# Altium PCB ui_main.PcbDoc (part 1 of 3)
Units mil, origin at the board's own origin, x right, y up, seen from the top; angles counter-clockwise.
Board outline 7342.57 x 2614.56 mil, 2 copper layers (Top Layer, Bottom Layer); 207 components, 158 nets, 707 pads, 687 vias.
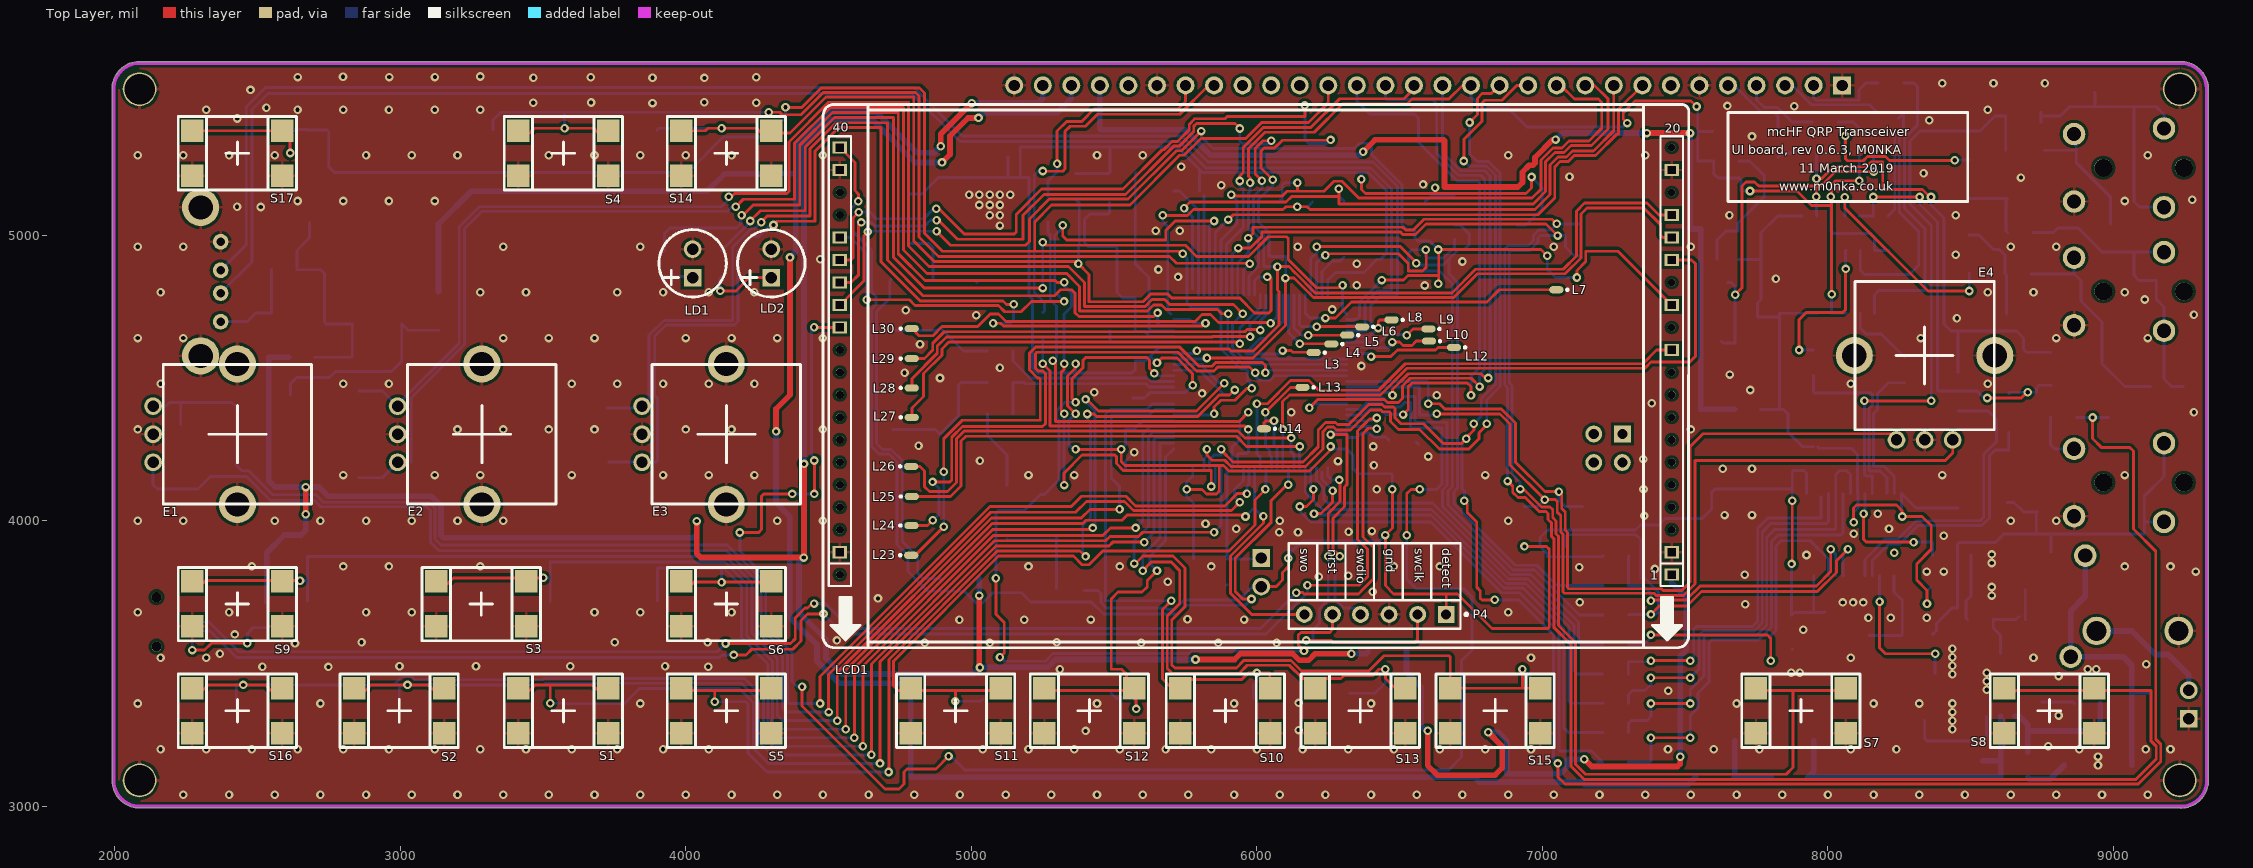
[diagram p0: Top Layer view]
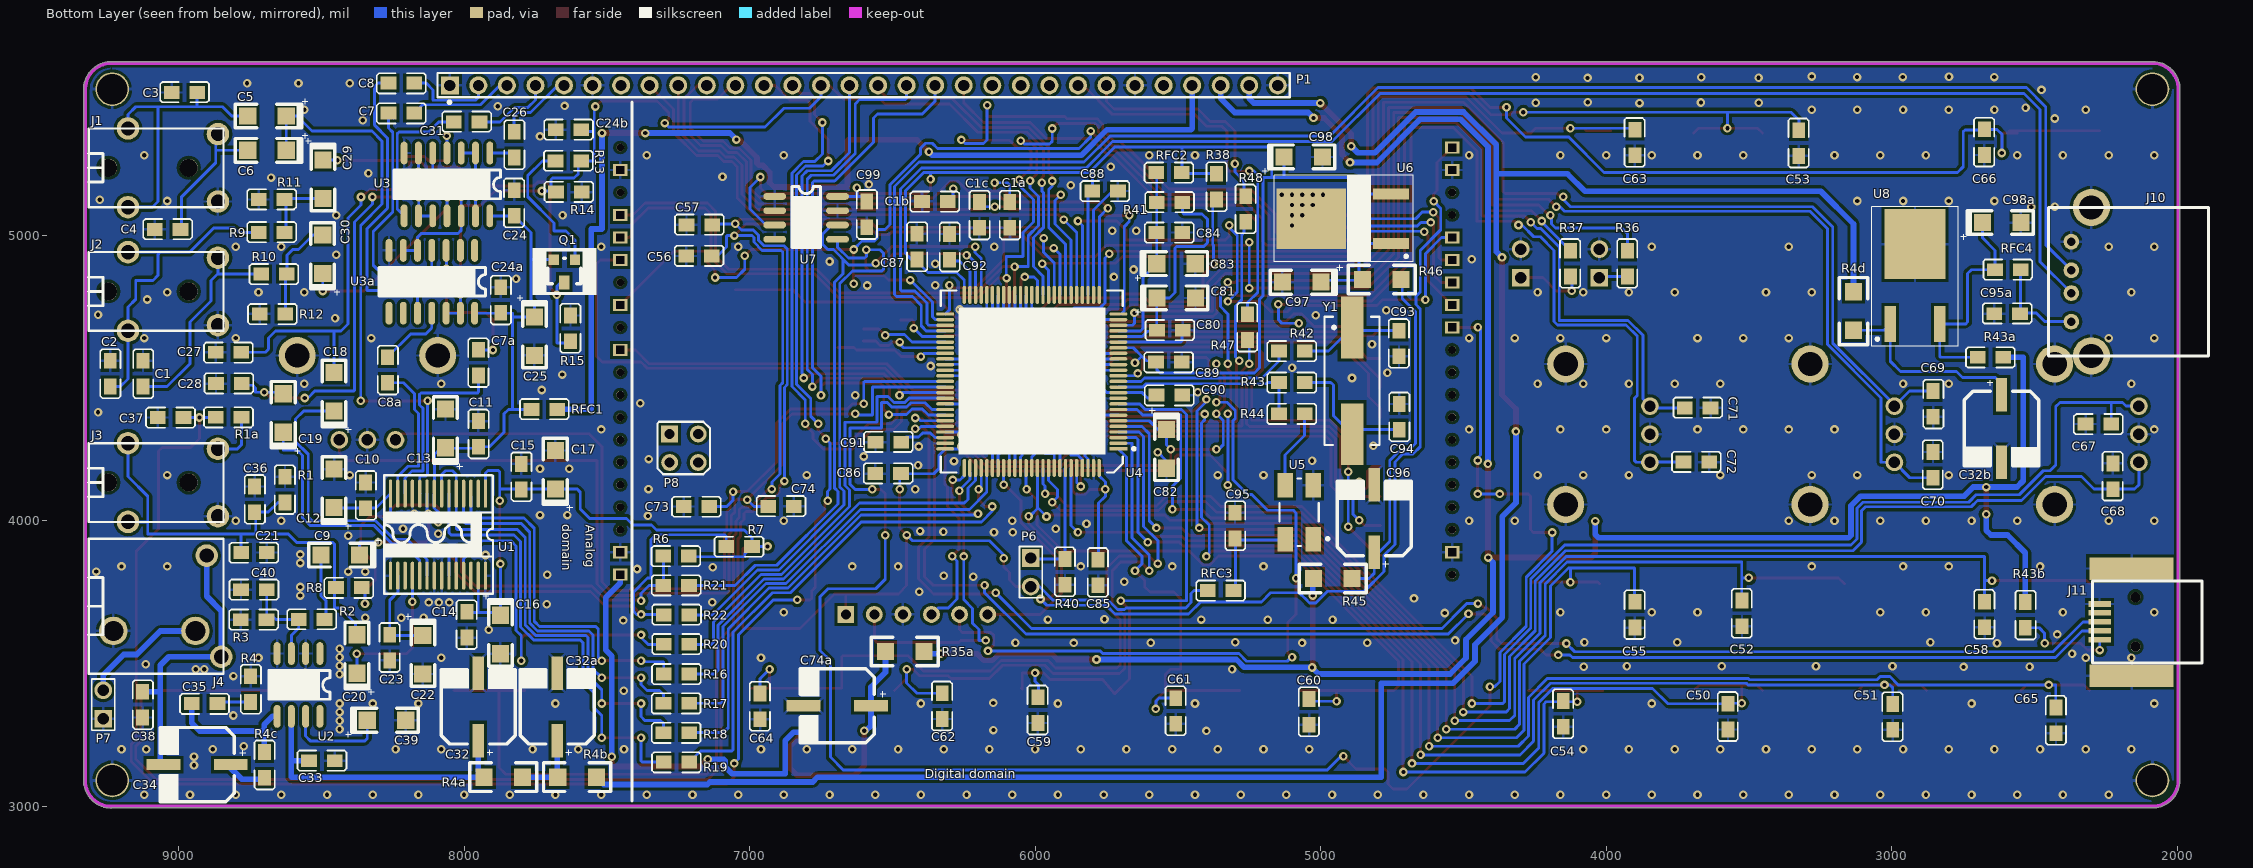
[diagram p1: Bottom Layer view, seen from below]

## Layer stack, top to bottom
Top Solder: solder mask 0.4, Solder Resist, Dk 3.5
Top Layer: signal copper 1.4
Dielectric1: core 12.6, FR-4, Dk 4.8
Bottom Layer: signal copper 1.4
Bottom Solder: solder mask 0.4, Solder Resist, Dk 3.5

## Board outline
2080.26,2994.34 cw(c2086.71,3090.71) 1990.14,3088.89 cw(c1996.06,3089) 1990.14,3089 1990.14,5509.94 cw(c2086.71,5511.71) 2084.89,5608.28 cw(c2085,5602.36) 2085,5608.28 9233.94,5608.28 cw(c9235.71,5511.71) 9332.12,5517.53 cw(c9326.77,5515) 9332.69,5515 9332.69,3092.06 ccw(c9236.12,3090.29) 9332.69,3092.11 9332.69,3092.06 cw(c9236.12,3090.29) 9332.71,3090.29 cw(c9236.12,3090.29) 9237.95,2993.72 cw(c9237.83,2999.64) 9235.8,2994.08 2082,2994.08 cw(c2082,3000)

## Design rules (kind name [scope] priority, off if disabled: settings)
Clearance Clearance_2 [InComponent('U4')] p1: gap=5 ignorepadtopadclearanceinfootprint=FALSE except(0: Arc-Hole Track-Hole SMDPad-Hole THPad-Hole Via-Hole Fill-Hole Poly-Hole Region-Hole Text-Hole)
Clearance Clearance_1 [InPolygon] p2: gap=10 ignorepadtopadclearanceinfootprint=FALSE except(0: Arc-Hole Track-Hole SMDPad-Hole THPad-Hole Via-Hole Fill-Hole Poly-Hole Region-Hole Text-Hole)
Clearance [All] p3: gap=6 ignorepadtopadclearanceinfootprint=FALSE except(0: Arc-Hole Track-Hole SMDPad-Hole THPad-Hole Via-Hole Fill-Hole Poly-Hole Region-Hole Text-Hole)
DiffPairsRouting [All] p1: maxlimit=50 minlimit=10 mostfreqgap=10 toplayer_minwidth=10 toplayer_maxwidth=10 toplayer_prefwidth=10 bottomlayer_minwidth=10 bottomlayer_maxwidth=10 bottomlayer_prefwidth=10 maxuncoupledlength=150
HoleSize [All] p1: absolutevalues=TRUE maxlimit=150 minlimit=1 maxpercent=80.000 minpercent=20.000
MatchedLengths "Schematic Matched Net Lengths_3" [InNet('USB_HOST_P')] p1: tolerance=150 checknetsindiffpair=TRUE checkdiffpairvsdiffpair=FALSE checkxsignals=FALSE checkothers=FALSE
MatchedLengths "Schematic Matched Net Lengths_2" [InNet('USB_HOST_N')] p2: tolerance=150 checknetsindiffpair=TRUE checkdiffpairvsdiffpair=FALSE checkxsignals=FALSE checkothers=FALSE
MatchedLengths "Schematic Matched Net Lengths_1" [InNet('USB_DFU_P')] p3: tolerance=150 checknetsindiffpair=TRUE checkdiffpairvsdiffpair=FALSE checkxsignals=FALSE checkothers=FALSE
MatchedLengths "Schematic Matched Net Lengths" [InNet('USB_DFU_N')] p4: tolerance=150 checknetsindiffpair=TRUE checkdiffpairvsdiffpair=FALSE checkxsignals=FALSE checkothers=FALSE
PolygonConnect PolygonConnect_4 [InComponent('C32') Or InComponent('C32a') or InComponent('C74a')or InComponent('C96') or InComponent('C32b')] p1: connectstyle=Relief reliefconductorwidth=10 reliefentries=4 polygonreliefangle="45 Angle" airgapwidth=10
PolygonConnect PolygonConnect_3 [InComponent('U6')] p2: connectstyle=Direct reliefconductorwidth=10 reliefentries=4 polygonreliefangle="90 Angle" airgapwidth=10
PolygonConnect PolygonConnect_2 [IsPad And (HoleDiameter = 2.7)] p3: connectstyle=Direct reliefconductorwidth=10 reliefentries=4 polygonreliefangle="90 Angle" airgapwidth=10
PolygonConnect PolygonConnect_1 [IsVia] p4: connectstyle=Direct reliefconductorwidth=10 reliefentries=4 polygonreliefangle="90 Angle" airgapwidth=10
PolygonConnect [All] p5: connectstyle=Relief reliefconductorwidth=10 reliefentries=4 polygonreliefangle="90 Angle" airgapwidth=10
RoomDefinition "Front panel user controls" [InComponentClass('Front panel user controls')] p1: confinementstyle=ConfineOut formatcopy=TRUE lockcomponents=FALSE outline 7384,2736 9343,2736 9343,2961 7384,2961
RoomDefinition "Codec and audio switching" [InComponentClass('Codec and audio switching')] p2: confinementstyle=ConfineOut formatcopy=TRUE lockcomponents=FALSE outline 4477,2736 7364,2736 7364,2957 4477,2957
RoomDefinition "Mcu, power and clocks" [InComponentClass('Mcu, power and clocks')] p3: confinementstyle=ConfineOut formatcopy=TRUE lockcomponents=FALSE outline 3501,2740 4455,2740 4455,2963 3501,2963
RoomDefinition "RF board interface and USB" [InComponentClass('RF board interface and USB')] p4: confinementstyle=ConfineOut formatcopy=TRUE lockcomponents=FALSE outline 1998,2742 3487,2742 3487,2961 1998,2961
RoutingVias [All] p1: holewidth=15 width=30 viastyle="Through Hole" minholewidth=28 minwidth=50 maxholewidth=28 maxwidth=50
SilkToSilkClearance [All] p1: silktosilkclearance=5
SilkToSolderMaskClearance SilkscreenOverComponentPads [IsPad] p1: minsilkscreentomaskgap=0 clearancetoexposedcopper=TRUE
SolderMaskExpansion SolderMaskExpansion_1 [IsVia] p1: expansion=-15 istentingtop=FALSE
SolderMaskExpansion [All] p2: expansion=4 istentingtop=FALSE
Width Width_UI_8V [(InNet('UI_8V') OR InNet('NetC32_1') OR InNet('NetC32a_1') OR InNet('NetC34_1') OR InNet('NetC34_2') OR InNet('NetJ4_B'))   OR InNet('NetC35_2')] p1: maxlimit=20 minlimit=20 preferedwidth=20
Width Width_UI_5V [(InNet('UI_5V') OR InNet('NetC74a_1'))] p2: maxlimit=20 minlimit=20 preferedwidth=20
Width Width_UI_3V [(InNet('UI_3V3'))] p3: maxlimit=20 minlimit=20 preferedwidth=20
Width [All] p4: maxlimit=10 minlimit=10 preferedwidth=10
26 further rules are at their usual default settings.

## Classes and differential pairs
component class "RF board interface and USB": C1a C1b C1c P1 P4 P8 R47 R48
component class "Mcu, power and clocks": C32b C80 C81 C82 C83 C84 C85 C86 C87 C88 C89 C90 C91 C92 C93 C94 C95 C95a C96 C97 C98 C98a C99 J10 J11 P6 R4d R38 R40 R41 R42 R43 R43a R43b R44 R45 R46 RFC2 RFC3 RFC4 U4 U5 U6 U7 U8 Y1
component class "Front panel user controls": C50 C51 C52 C53 C54 C55 C56 C57 C58 C59 C60 C61 C62 C63 C64 C65 C66 C67 C68 C69 C70 C71 C72 C73 C74 C74a E1 E2 E3 E4 L3 L4 L5 L6 L7 L8 L9 L10 L12 L13 L14 L23 L24 L25 L26 L27 L28 L29 L30 LCD1 LD1 LD2 R35a R36 R37 S1 S2 S3 S4 S5 S6 S7 S8 S9 S10 S11 S12 S13 S14 S15 S16 S17
component class "Codec and audio switching": C1 C2 C3 C4 C5 C6 C7 C7a C8 C8a C9 C10 C11 C12 C13 C14 C15 C16 C17 C18 C19 C20 C21 C22 C23 C24 C24a C24b C25 C26 C27 C28 C29 C30 C31 C32 C32a C33 C34 C35 C36 C37 C38 C39 C40 J1 J2 J3 J4 P7 Q1 R1 R1a R2 R3 R4 R4a R4b R4c R6 R7 R8 R9 R10 R11 R12 R13 R14 R15 R16 R17 R18 R19 R20 R21 R22 RFC1 U1 U2 U3 U3a
differential pair USB_DFU: +USB_DFU_P -USB_DFU_N
differential pair USB_HOST: +USB_HOST_P -USB_HOST_N

## Components (designator, comment, footprint, x,y, rotation, side; value= is the part's Value field where it differs from the comment)
C1 "1nF" 0805-Pro 9124.78,4560.86 r270 bottom
C1a "1nF" 0805-Pro 6089,5117 r270 bottom
C1b "1nF" 0805-Pro 6305,5119 r0 bottom
C1c "1nF" 0805-Pro 6195,5117 r270 bottom
C2 "1nF" 0805-Pro 9239.78,4560.86 r270 bottom
C3 "1nF" 0805-Pro 9025,5500 r180 bottom
C4 "1nF" 0805-Pro 9084.14,5020.22 r180 bottom
C5 "1uF" 1206_ELEC_CAP_N 8622,5418 r0 bottom
C6 "1uF" 1206_ELEC_CAP_N 8622,5298 r0 bottom
C7 "470nF" 0805-Pro 8174,5428 r0 bottom
C7a "470nF" 0805-Pro 7949.17,4507.8 r90 bottom
C8 "470nF" 0805-Pro 8174,5533 r0 bottom
C8a "470nF" 0805-Pro 8268,4574 r270 bottom
C9 "1uF" 1206_ELEC_CAP_N 8365,3880 r0 bottom
C10 "100nF" 0805-Pro 8345,4135 r270 bottom
C11 "100nF" 0805-Pro 7950,4350 r270 bottom
C12 "10uF" 1206_ELEC_CAP_N 8455,4045 r90 bottom
C13 "10uF" 1206_ELEC_CAP_N 8065,4255 r90 bottom
C14 "100nF" 0805-Pro 7990,3590 r90 bottom
C15 "100nF" 0805-Pro 7800,4200 r270 bottom
C16 "10uF" 1206_ELEC_CAP_N 7873,3670 r270 bottom
C17 "10uF" 1206_ELEC_CAP_N 7680,4110 r90 bottom
C18 "1uF" 1206_ELEC_CAP_N 8455,4383 r90 bottom
C19 "1uF" 1206_ELEC_CAP_N 8633,4309 r90 bottom
C20 "1uF" 1206_ELEC_CAP_N 8375,3465 r90 bottom
C21 "220pF" 0805-Pro 8690,3889 r0 bottom
C22 "10uF" 1206_ELEC_CAP_N 8144.78,3599.14 r270 bottom
C23 "100nF" 0805-Pro 8260,3510 r90 bottom
C24 "100nF" 0805-Pro 7824,5067 r90 bottom
C24a "100nF" 0805-Pro 7872,4819 r270 bottom
C24b "100nF" 0805-Pro 7680.14,5369.22 r180 bottom
C25 "10uF" 1206_ELEC_CAP_N 7754,4715 r270 bottom
C26 "470nF" 0805-Pro 7824.78,5363 r270 bottom
C27 "220pF" 0805-Pro 8779.14,4590.22 r0 bottom
C28 "220pF" 0805-Pro 8870,4480 r180 bottom
C29 "1uF" 1206_ELEC_CAP_N 8495,5265 r270 bottom
C30 "1uF" 1206_ELEC_CAP_N 8495,4865 r90 bottom
C31 "470nF" 0805-Pro 8037,5397 r180 bottom
C32 "220uF" CAP_ALUM 7950,3348 r90 bottom
C32a "220uF" CAP_ALUM 7674,3348 r90 bottom
C32b "220uF" CAP_ALUM 2615,4323 r270 bottom
C33 "100nF" 0805-Pro 8544,3159 r180 bottom
C34 "220uF" CAP_ALUM 8935,3146 r0 bottom
C35 "47nF" 0805-Pro 8862.86,3359.78 r0 bottom
C36 "1nF" 0805-Pro 8734,4121 r270 bottom
C37 "1nF" 0805-Pro 8982,4362 r0 bottom
C38 "1nF" 0805-Pro 9126,3402 r270 bottom
C39 "10uF" 1206_ELEC_CAP_N 8340,3301 r180 bottom
C40 "1nF" 0805-Pro 8782,3758 r180 bottom
C50 "100nF" 0805-Pro 3573,3268 r90 bottom
C51 "100nF" 0805-Pro 2996,3267 r90 bottom
C52 "100nF" 0805-Pro 3524,3630 r90 bottom
C53 "100nF" 0805-Pro 3325,5277 r90 bottom
C54 "100nF" 0805-Pro 4150,3278 r90 bottom
C55 "100nF" 0805-Pro 3899,3625 r90 bottom
C56 "100nF" 0805-Pro 7223,4927 r180 bottom
C57 "100nF" 0805-Pro 7222,5036 r180 bottom
C58 "100nF" 0805-Pro 2674,3626 r90 bottom
C59 "100nF" 0805-Pro 5990,3291 r90 bottom
C60 "100nF" 0805-Pro 5040,3285 r90 bottom
C61 "100nF" 0805-Pro 5507,3288 r90 bottom
C62 "100nF" 0805-Pro 6325,3305 r90 bottom
C63 "100nF" 0805-Pro 3899,5279 r90 bottom
C64 "100nF" 0805-Pro 6963,3304 r90 bottom
C65 "100nF" 0805-Pro 2424,3255 r90 bottom
C66 "100nF" 0805-Pro 2675,5280 r90 bottom
C67 "1nF" 0805-Pro 2229.78,4339.14 r0 bottom
C68 "1nF" 0805-Pro 2225,4110 r90 bottom
C69 "1nF" 0805-Pro 2855,4455 r270 bottom
C70 "1nF" 0805-Pro 2855,4150 r90 bottom
C71 "1nF" 0805-Pro 3725,4395 r180 bottom
C72 "1nF" 0805-Pro 3730,4205 r180 bottom
C73 "1nF" 0805-Pro 7140,4050 r0 bottom
C74 "1nF" 0805-Pro 6936,4050 r180 bottom
C74a "220uF" CAP_ALUM 6693,3352 r0 bottom
C80 "100nF" 0805-Pro 5574.14,4667 r180 bottom
C81 "1uF" 1206_ELEC_CAP_N 5574.14,4780.22 r180 bottom
C82 "1uF" 1206_ELEC_CAP_N 5540,4320 r270 bottom locked
C83 "1uF" 1206_ELEC_CAP_N 5575,4900 r180 bottom
C84 "100nF" 0805-Pro 5483.92,5010 r0 bottom
C85 "100nF" 0805-Pro 5779,3773 r90 bottom
C86 "100nF" 0805-Pro 6560.86,4164.78 r180 bottom
C87 "100nF" 0805-Pro 6414,5006 r270 bottom
C88 "100nF" 0805-Pro 5709.14,5155.22 r0 bottom
C89 "100nF" 0805-Pro 5486,4556 r0 bottom
C90 "100nF" 0805-Pro 5484.14,4440.22 r0 bottom
C91 "2.2uF" 0805-Pro 6560,4275 r180 bottom
C92 "2.2uF" 0805-Pro 6300,5005 r270 bottom
C93 "20pF" 0805-Pro 4725,4575 r90 bottom
C94 "20pF" 0805-Pro 4725,4410 r270 bottom
C95 "100nF" 0805-Pro 5300,4029 r270 bottom
C95a "100nF" 0805-Pro 2641,4725 r180 bottom
C96 "220uF" CAP_ALUM 4812,4008 r90 bottom
C97 "10uF" 1206_ELEC_CAP_N 4998,4836 r0 bottom
C98 "10uF" 1206_ELEC_CAP_N 5129.14,5274 r180 bottom
C98a "10uF" 1206_ELEC_CAP_N 2683,5044 r180 bottom
C99 "100nF" 0805-Pro 6590,5119 r270 bottom
E1 "ALPS-EC12E24" Encoder 2429.13,4303.15 r270 top locked
E2 "ALPS-EC12E24" Encoder 3285.43,4303.15 r270 top locked
E3 "ALPS-EC12E24" Encoder 4141.73,4303.15 r270 top locked
E4 "ALPS-EC12E24" Encoder 8338.58,4578.74 r0 top locked
J1 "Line Out" MX-387GL_new1 9314.96,5236.22 r90 bottom locked
J2 "Line In" MX-387GL_new1 9314.96,4803.15 r90 bottom locked
J3 "Mic" MX-387GL_new1 9314.96,4133.86 r90 bottom locked
J4 "KLBR-4" KLBR4 9314.96,3700.79 r90 bottom locked
J10 "Usb Host" USB_OUT_A 1889.76,5098.43 r0 bottom locked
J11 "Usb Dfu" MINI_USB_B_SMD 2260,3582.68 r0 bottom locked
L3 "TP" tp 6198,4589 r0 top
L4 "TP" tp 6260,4619 r0 top
L5 "TP" tp 6315.49,4650.32 r0 top
L6 "TP" tp 6368,4679 r0 top
L7 "TP" tp 7048,4809 r0 top
L8 "TP" tp 6470.93,4703.55 r0 top
L9 "TP" tp 6600,4671.81 r0 top
L10 "TP" tp 6602,4629 r0 top
L12 "TP" tp 6689.63,4607 r0 top
L13 "TP" tp 6159,4467 r0 top
L14 "TP" tp 6024,4322 r0 top
L23 "TP" tp 4789.86,3879.22 r180 top
L24 "TP" tp 4790.86,3983.44 r180 top
L25 "TP" tp 4792.08,4085 r180 top
L26 "TP" tp 4789.86,4190.22 r180 top
L27 "TP" tp 4791.86,4362.22 r180 top
L28 "TP" tp 4791.86,4465.22 r180 top
L29 "TP" tp 4791.86,4568.22 r180 top
L30 "TP" tp 4791.86,4673.22 r180 top
LCD1 "HY28B" HY28A 7452.76,3811.02 r180 top locked
LD1 "GREEN" LED2n 4023.62,4901.57 r90 top locked
LD2 "RED" LED2n 4299.21,4901.57 r90 top locked
P1 "Header 30" HDR1X30 8050,5525 r180 bottom locked
P4 "Nucleo Debug" HDR1X6 6663,3672 r180 top
P6 "DFU Mode" SIP2 6015,3870 r270 bottom
P7 "Speaker" SIP2 9264,3306.14 r90 bottom locked
P8 "Header 2X2" HDR2X2 7230,4254 r180 bottom locked
Q1 "NDS356AP" SOT-23-Pro 7611,4915 r0 bottom
R1 "47K" 0805-Pro 8627,4063 r90 bottom
R1a "100" 0805-Pro 8779,4363 r0 bottom
R2 "2.2K" 0805-Pro 8580,3654 r180 bottom
R3 "1K" 0805-Pro 8783,3653 r180 bottom
R4 "10" 0805-Pro 8748,3456 r270 bottom
R4a "2.2" 1206 7794,3102 r0 bottom
R4b "2.2" 1206 7536,3102 r0 bottom
R4c "0" 0805-Pro 8699.86,3190.78 r270 bottom
R4d "2.2" 1206 3134,4803 r270 bottom
R6 "4.7K" 0805-Pro 7212,3877 r0 bottom
R7 "4.7K" 0805-Pro 6991,3910 r0 bottom
R8 "680" 0805-Pro 8358,3766 r0 bottom
R9 "4.7K" 0805-Pro 8720,5010 r180 bottom
R10 "4.7K" 0805-Pro 8620,4865 r0 bottom
R11 "4.7K" 0805-Pro 8720,5125 r180 bottom
R12 "4.7K" 0805-Pro 8625,4725 r0 bottom
R13 "4.7K" 0805-Pro 7681,5260 r180 bottom
R14 "4.7K" 0805-Pro 7679,5151 r180 bottom
R15 "4.7K" 0805-Pro 7627,4628 r90 bottom
R16 "100" 0805-Pro 7210,3464 r0 bottom
R17 "100" 0805-Pro 7211,3361 r0 bottom
R18 "100" 0805-Pro 7211,3258 r0 bottom
R19 "100" 0805-Pro 7210,3155 r0 bottom
R20 "100" 0805-Pro 7302,3567 r180 bottom
R21 "100" 0805-Pro 7303,3773 r180 bottom
R22 "100" 0805-Pro 7302,3670 r180 bottom
R35a "4.7" 1206 6388,3542 r0 bottom
R36 "680" 0805-Pro 3925,4855 r90 bottom
R37 "680" 0805-Pro 4125,4855 r90 bottom
R38 "4.7k" 0805-Pro 5365.22,5215.86 r270 bottom
R40 "1k" 0805-Pro 5895,3775 r90 bottom
R41 "47" 0805-Pro 5575,5115 r180 bottom
R42 "220" 0805-Pro 5055,4595 r0 bottom
R43 "0" 0805-Pro 5055,4485 r0 bottom
R43a "0" 0805-Pro 2608,4573 r0 bottom
R43b "0" 0805-Pro 2532,3716 r270 bottom
R44 "0" 0805-Pro 5055,4375 r0 bottom
R45 "2.2" 1206 5025.86,3797.78 r180 bottom
R46 "2.2" 1206 4718,4845 r0 bottom
R47 "220" 0805-Pro 5256,4632 r90 bottom
R48 "220" 0805-Pro 5262,5046 r90 bottom
RFC1 "47uH" 0805-Pro 7765,4390 r180 bottom
RFC2 "47uH" 0805-Pro 5485,5220 r0 bottom
RFC3 "47uH" 0805-Pro 5304,3756 r0 bottom
RFC4 "47uH" 0805-Pro 2639,4879 r180 bottom
S1 "Button" BUTTON_SMD2 3767.72,3452.76 r180 top locked
S2 "Button" BUTTON_SMD2 3192.91,3452.76 r180 top locked
S3 "Button" BUTTON_SMD2 3480.32,3826.77 r180 top locked
S4 "Button" BUTTON_SMD2 3767.72,5405.51 r180 top locked
S5 "Button" BUTTON_SMD2 4338.58,3452.76 r180 top locked
S6 "Button" BUTTON_SMD2 4338.58,3826.77 r180 top locked
S7 "Button" BUTTON_SMD2 8102.36,3452.76 r180 top locked
S8 "Button" BUTTON_SMD2 8972.44,3452.76 r180 top locked
S9 "Button" BUTTON_SMD2 2625.98,3826.77 r180 top locked
S10 "Button" BUTTON_SMD2 6086.61,3452.76 r180 top locked
S11 "Button" BUTTON_SMD2 5141.73,3452.76 r180 top locked
S12 "Button" BUTTON_SMD2 5610.24,3452.76 r180 top locked
S13 "Button" BUTTON_SMD2 6559.06,3452.76 r180 top locked
S14 "Button" BUTTON_SMD2 4338.58,5405.51 r180 top locked
S15 "Button" BUTTON_SMD2 7031.5,3452.76 r180 top locked
S16 "Button" BUTTON_SMD2 2625.98,3452.76 r180 top locked
S17 "Button" BUTTON_SMD2 2625.98,5405.51 r180 top locked
U1 "WM8731" SSOP-28-Pro 7925,4095 r270 bottom locked
U2 "LM386M-1" SO-8-Pro 8505,3535 r270 bottom locked
U3 "74HC4066" SO-14-Pro 7910,5288 r270 bottom
U3a "74HC4066" SO-14-Pro 7963,4947 r270 bottom
U4 "STM32F437VIT7" SQFP14X14-100-PRO 5708.66,4251.97 r0 bottom locked
U5 "FOX924B-16.000" 2SMX-3SMXB 5075,4030 r90 bottom
U6 "KA78RM33RTF" TO-252 4974,5058 r0 bottom
U7 "24LC1025" SO-8-Pro 6912,5136 r180 bottom
U8 "NCP5501DT50G" TO-252 2918,4910 r90 bottom
Y1 "16Mhz" HC49/4H_SMX 4890,4490 r270 bottom

## Footprints (in the part's own frame and the unit in brackets; to place one, negate y for a bottom-side part, rotate by r counter-clockwise, add the part's x,y. Pads: shape width x height; smd on the part's side, far side on the other; paste and mask are expansions set on the pad)
2SMX-3SMXB [mm] "Quartz Crystal, SM; Body 6.0 x 3.5 mm (LxW)"
  rect 2.2x1.4 smd: 1(-2.4,-1.25) 2(2.4,-1.25) 3(2.4,1.25) 4(-2.4,1.25)
  silkscreen extent -3,-2.66 3,1.75
0805-Pro [mil]
  rect 55x45 smd: 1(0.86,0.22) 2(90.86,0.22)
  silkscreen extent -39,-34 132,36
1206 [mil]
  rect 60x60 smd: 1(0.86,0.22) 2(135.86,0.22)
  silkscreen extent -49,-50 186,50
1206_ELEC_CAP_N [mil]
  rect 60x60 smd: 1(0.86,0.22) 2(135.86,0.22)
  silkscreen extent -75,-60 179,42
BUTTON_SMD2 [mm]
  rect 2x2 smd: 1(1,5) 1(9,5) 2(1,1) 2(9,1)
  silkscreen extent -0.25,-0.25 10.26,6.27
CAP_ALUM [mm]
  rect 3x1 smd: 1(-3,0) 2(3,0)
  silkscreen extent -4.32,-3.3 3.33,3.3
Encoder [mil] "Alps Rotary Encoder"
  round 130 hole 85: 1(-246.06,0) 2(246.06,0)
  round 62 hole 40: A(-98.43,-295.28) B(98.43,-295.28) C(0,-295.28)
  silkscreen extent -244,-260 244,260
HC49/4H_SMX [mm] "Quartz Crystal, SM; Body 13.4 (inc. leads) x 4.9 mm (LxW max)"
  rect 5.5x2 smd: 1(-4.75,0) 2(4.75,0)
  silkscreen extent -5.7,-2.45 5.7,2.45
HDR1X6 [mm] "ST Nucleo Debug 6 pin connector"
  rect 1.5x1.5 hole 0.9: 1(0,0)
  round 1.5 hole 0.9: 2(2.54,0) 3(5.08,0) 4(7.62,0) 5(10.12,0) 6(12.62,0)
  silkscreen extent -1.9,-6.32 14,1.27
HDR1X30 [mm] "Connector; Header; 30 Position"
  rect 1.6x1.6 hole 0.99: 1(0,0)
  round 1.6 hole 0.99: 2(2.54,0) 3(5.08,0) 4(7.62,0) 5(10.16,0) 6(12.7,0) 7(15.24,0) 8(17.78,0) 9(20.32,0) 10(22.86,0) 11(25.4,0) 12(27.94,0) 13(30.48,0) 14(33.02,0) 15(35.56,0) 16(38.1,0) 17(40.64,0) 18(43.18,0) 19(45.72,0) 20(48.26,0) 21(50.8,0) 22(53.34,0) 23(55.88,0) 24(58.42,0) 25(60.96,0) 26(63.5,0) 27(66.04,0) 28(68.58,0) 29(71.12,0) 30(73.66,0)
  silkscreen extent -1.09,-1.62 74.73,1.09
HDR2X2 [mm] "Connector; Header; 2x2 Position"
  rect 1.5x1.5 hole 0.9: 1(-1.27,1.27)
  round 1.5 hole 0.9: 2(-1.27,-1.27) 3(1.27,1.27) 4(1.27,-1.27)
  silkscreen extent -2.36,-2.31 2.31,2.36
HY28A [mm]
  rect 1.27x1.07 hole 0.7 square: 1(0,0) 2(0,-2) 11(0,-20) 13(0,-24) 15(0,-28) 16(0,-30) 17(0,-32) 19(0,-36) 22(74,-2) 32(74,-22) 33(74,-24) 34(74,-26) 35(74,-28) 36(74,-30) 39(74,-36) 40(74,-38)
  round 0.7 hole 0.7 unplated: 3(0,-4) 4(0,-6) 5(0,-8) 6(0,-10) 7(0,-12) 8(0,-14) 9(0,-16) 10(0,-18) 12(0,-22) 14(0,-26) 18(0,-34) 20(0,-38) 21(74,0) 23(74,-4) 24(74,-6) 25(74,-8) 26(74,-10) 27(74,-12) 28(74,-14) 29(74,-16) 30(74,-18) 31(74,-20) 37(74,-32) 38(74,-34)
  silkscreen extent -1.52,-41.84 75.5,6.5
KLBR4 [mm] "Lumberg KLBR4 phones receptacle"
  round 2.54 hole 1.8: B(-2.2,-9.5) S(-2.2,-2.2)
  round 2 hole 1.27: R(-4.5,-11.8) T(4.5,-10.5)
  silkscreen extent -6,-12 6,0
LED2n [mil]
  rect 62x62 hole 40: 1(-50,0)
  round 62 hole 40: 2(50,0)
  silkscreen extent -118,-118 118,118
MINI_USB_B_SMD [mm]
  round 0.9 hole 0.9: 0(-2.9,-3.8) 0(-2.9,0.6)
  rect 2x0.5 smd: 1(0.3,0) 2(0.3,-0.8) 3(0.3,-1.6) 4(0.3,-2.4) 5(0.3,-3.2)
  rect 7.5x2 smd: 6(-2.54,3.175) 7(-2.54,-6.35)
  silkscreen extent -8.8,-5.25 0.91,2.05
MX-387GL_new1 [mm] "Pro Signal 3pin receptacle"
  round 1.6 hole 1.6 unplated: 0(0,-8.9) 0(0,-1.74)
  round 2 hole 1.27: R(3,-11.5) S(-3,-11.5) T(-3.5,-3.5) T(3.5,-3.5)
  silkscreen extent -3.5,-12 3.5,0
SIP2 [mil]
  rect 62x62 hole 40: 1(0.39,-0.11)
  round 62 hole 40: 2(100.39,-0.11)
  silkscreen extent -40,-40 140,40
SO-8-Pro [mil]
  oval 80x24 smd: 1(0,0) 2(0,-50) 3(0,-100) 4(0,-150) 5(220,-150) 6(220,-100) 7(220,-50) 8(220,0)
  silkscreen extent 60,-179 160,35
SO-14-Pro [mil]
  oval 80x24 smd: 1(0,0) 2(0,-50) 3(0,-100) 4(0,-150) 5(0,-200) 6(0,-250) 7(0,-300) 8(220,-300) 9(220,-250) 10(220,-200) 11(220,-150) 12(220,-100) 13(220,-50) 14(220,0)
  silkscreen extent 59,-335 161,38
SOT-23-Pro [mil]
  rect 36x36 smd: 1(0.39,0.34) 2(75.39,0.34)
  rect 36x50 smd: 3(38.39,80.34)
  silkscreen extent -75,-40 150,125
SQFP14X14-100-PRO [mil]
  rect 62.99x12 smd: 1(-0.11,0.19)
  oval 62.99x12 smd: 2(-0.11,-19.5) 3(-0.11,-39.18) 4(-0.11,-58.87) 5(-0.11,-78.55) 6(-0.11,-98.24) 7(-0.11,-117.92) 8(-0.11,-137.61) 9(-0.11,-157.29) 10(-0.11,-176.98) 11(-0.11,-196.66) 12(-0.11,-216.35) 13(-0.11,-236.03) 14(-0.11,-255.72) 15(-0.11,-275.4) 16(-0.11,-295.09) 17(-0.11,-314.77) 18(-0.11,-334.46) 19(-0.11,-354.14) 20(-0.11,-373.83) 21(-0.11,-393.51) 22(-0.11,-413.2) 23(-0.11,-432.88) 24(-0.11,-452.57) 25(-0.11,-472.25) 51(606.19,-472.25) 52(606.19,-452.57) 53(606.19,-432.88) 54(606.19,-413.2) 55(606.19,-393.51) 56(606.19,-373.83) 57(606.19,-354.14) 58(606.19,-334.46) 59(606.19,-314.77) 60(606.19,-295.09) 61(606.19,-275.4) 62(606.19,-255.72) 63(606.19,-236.03) 64(606.19,-216.35) 65(606.19,-196.66) 66(606.19,-176.98) 67(606.19,-157.29) 68(606.19,-137.61) 69(606.19,-117.92) 70(606.19,-98.24) 71(606.19,-78.55) 72(606.19,-58.87) 73(606.19,-39.18) 74(606.19,-19.5) 75(606.19,0.19)
  oval 12x62.99 smd: 26(66.82,-539.18) 27(86.5,-539.18) 28(106.19,-539.18) 29(125.87,-539.18) 30(145.56,-539.18) 31(165.24,-539.18) 32(184.93,-539.18) 33(204.61,-539.18) 34(224.3,-539.18) 35(243.98,-539.18) 36(263.67,-539.18) 37(283.35,-539.18) 38(303.04,-539.18) 39(322.72,-539.18) 40(342.41,-539.18) 41(362.09,-539.18) 42(381.78,-539.18) 43(401.46,-539.18) 44(421.15,-539.18) 45(440.83,-539.18) 46(460.52,-539.18) 47(480.2,-539.18) 48(499.89,-539.18) 49(519.57,-539.18) 50(539.26,-539.18) 76(539.26,67.11) 77(519.57,67.11) 78(499.89,67.11) 79(480.2,67.11) 80(460.52,67.11) 81(440.83,67.11) 82(421.15,67.11) 83(401.46,67.11) 84(381.78,67.11) 85(362.09,67.11) 86(342.41,67.11) 87(322.72,67.11) 88(303.04,67.11) 89(283.35,67.11) 90(263.67,67.11) 91(243.98,67.11) 92(224.3,67.11) 93(204.61,67.11) 94(184.93,67.11) 95(165.24,67.11) 96(145.56,67.11) 97(125.87,67.11) 98(106.19,67.11) 99(86.5,67.11) 100(66.82,67.11)
  silkscreen extent -60,-555 622,83
SSOP-28-Pro [mm]
  rect 2.5x0.3 smd: 1(0,0)
  oval 2.5x0.3 smd: 2(0,-0.65) 3(0,-1.3) 4(0,-1.95) 5(0,-2.6) 6(0,-3.25) 7(0,-3.9) 8(0,-4.55) 9(0,-5.2) 10(0,-5.85) 11(0,-6.5) 12(0,-7.15) 13(0,-7.8) 14(0,-8.45) 15(7.3,-8.45) 16(7.3,-7.8) 17(7.3,-7.15) 18(7.3,-6.5) 19(7.3,-5.85) 20(7.3,-5.2) 21(7.3,-4.55) 22(7.3,-3.9) 23(7.3,-3.25) 24(7.3,-2.6) 25(7.3,-1.95) 26(7.3,-1.3) 27(7.3,-0.65) 28(7.3,0)
  silkscreen extent -1.63,-9.02 8.92,0.66
TO-252 [mm] "Plastic flagne mount package"
  rect 3.2x1 smd: 1(-5.6,2.2) 3(-5.6,-2.2)
  rect 6.2x5.4 smd: 2(1.5,0)
  silkscreen extent -7.6,-3.85 4.8,3.85
tp [mil]
  oval 50x25 smd: 1(0.86,0.22)
  silkscreen extent 36,-3 42,3
USB_OUT_A [mil]
  round 55 hole 30: 1(480.7,120.96) 2(480.7,220.96) 3(480.7,300.96) 4(480.7,400.96)
  round 130 hole 85: 5(410.7,520.96) 6(410.7,0.96)
  silkscreen extent 1,1 561,521

## Part data
C1 C1a C1b C1c C2 C3 C4 C7 C7a C8 C8a C10 C11 C14 C15 C21 C23 C24 C24a C24b C26 C27 C28 C31 C33 C35 C36 C37 C38 C40 C50 C51 C52 C53 C54 C55 C56 C57 C58 C59 C60 C61 C62 C63 C64 C65 C66 C67 C68 C69 C70 C71 C72 C73 C74 C80 C84 C85 C86 C87 C88 C89 C90 C91 C92 C93 C94 C95 C95a C99: library part CAP, "Capacitor"
  C1 C1a C1b C1c C2 C3 C4 C36 C37 C38 C40 C67 C68 C69 C70 C71 C72 C73 C74: Order="FN 185-6408", Price=0.01, QT Order=QCC-00259
  C7 C7a C8 C8a C26 C31: Order="FN 232-0847", Price=0.062, QT Order=QCC-00105
  C10 C11 C14 C15 C23 C24 C24a C24b C33 C50 C51 C52 C53 C54 C55 C56 C57 C58 C59 C60 C61 C62 C63 C64 C65 C66 C80 C84 C85 C86 C87 C88 C89 C90 C95 C95a C99: Order="FN 174-0673", Price=0.068, QT Order=QCC-00154
  C21 C27 C28: Order="FN 175-9208", Price=0.069, QT Order=QCC-00072
  C35: Order="FN 152-0303", Price=0.03, QT Order=QCC-00101
  C91 C92: Order="FN 184-5751", Price=0.115, QT Order=QCC-00103
  C93 C94: Checked=NA, Order="FN 233-2762", Price=0.094
C5 C6 C9 C12 C13 C16 C17 C18 C19 C20 C22 C25 C29 C30 C32 C32a C32b C34 C39 C74a C81 C82 C83 C96 C97 C98 C98a: library part CAP-POL, "Electrolitic capacitor"
  C5 C6 C9 C18 C19 C20 C29 C30 C81 C82 C83: Order="FN 145-7406", Price=0.235, QT Order=QCC-00165
  C12 C13 C16 C17 C22 C25 C39 C97 C98 C98a: Order="FN 233-3009", Price=0.204, QT Order=QCC-00166
  C32 C32a C32b C34 C74a C96: Order="FN 225-4321", Price=0.34, QT Order=QCC-00320
E1 E2 E3 E4: library part Encoder, "ALPS Rotary Encoder", Order="FN 152-0812", Price=1.00
J1 J2 J3: library part MX-387GL, "Jack Socket,Thru-Hole", Order="FN 126-7376", Price=0.59
J4: library part PhoneJack, "Jack Socket 4 pin", Function=Phones, Order="FN 121-7016", Price=1.28
J10: library part USB_OUT, "USB Host Connector", Order="FN 117-7883", Price=0.60
J11: library part MINI_USB_B, "Mini USB connector", Order="FN 211-2367", Price=0.62, QT Order=QCJ-00083
L3 L4 L5 L6 L7 L8 L9 L10 L12 L13 L14 L23 L24 L25 L26 L27 L28 L29 L30: "Test point"
LCD1: library part HY28AB, "2.8 inch TFT LCD"
LD1 LD2: library part LED2, "LED 3mm", Revision="July-2002: Re-released for DXP Platform."
  LD1: Order="FN 211-2096", Price=0.116
  LD2: Order="FN 211-2100", Price=0.148
P1: "Header, 30-Pin", Order=NA, Price=0.295
P4: library part Nucleo_6, "ST Nucleo 6 pin header"
P6 P7: library part "Header 2", "Header, 2-Pin", Checked=NA
  P6: Order=NA, Price=0
  P7: Order="FN 168-3898", Price=5.57
P8: "Header, 2-Pin, Dual row", LatestRevisionDate=17-Jul-2002, LatestRevisionNote="Re-released for DXP Platform.", Publisher="Altium Limited"
Q1: "MOSFET transistor", Order="FN 984-6409", Price=0.31, QT Order=QCT-00010
R1 R1a R2 R3 R4 R4a R4b R4c R4d R6 R7 R8 R9 R10 R11 R12 R13 R14 R15 R16 R17 R18 R19 R20 R21 R22 R35a R36 R37 R38 R40 R41 R42 R43 R43a R43b R44 R45 R46 R47 R48: library part RES, "Resistor"
  R1: Order="FN 146-9929", Price=0.021, QT Order=QCR-00365
  R1a R16 R17 R18 R19 R20 R21 R22: Order="FN 933-2375", Price=0.027, QT Order=QCR-00301
  R2: Order="FN 188-7289", Price=0.046, QT Order=QCR-00333
  R3 R40: Order="FN 157-6459", Price=0.061, QT Order=QCR-00326
  R4: Order="FN 933-2421", Price=0.013, QT Order=QCR-00279
  R4a R4b R4d R45 R46: Order="FN 207-8984", Price=0.02, QT Order=QCR-00412
  R4c R43 R43a R43b R44: Order="FN 933-3681", Price=0.009, QT Order=QCR-00268
  R6 R7 R9 R10 R11 R12 R13 R14 R15 R38: Order="FN 200-8383", Price=0.024, QT Order=QCR-00341
  R8 R36 R37: Order="FN 933-3460", Price=0.054, QT Order=QCR-00321
  R35a: Order="FN 207-8986", Price=0.02, QT Order=QCR-00415
  R41: Order="FN 173-8942", Price=0.052, QT Order=QCR-00293
  R42 R47 R48: Order="FN 933-2804", Price=0.007, QT Order=QCR-00309
RFC1 RFC2 RFC3 RFC4: library part Inductor, "Inductor", Order="FN 166-9895", Price=0.16
S1 S2 S3 S4 S5 S6 S7 S8 S9 S10 S11 S12 S13 S14 S15 S16 S17: library part SW-PB, "Push Button", Order="EB 290913735944", Price=0.14
  S1: Software function=G3
  S2: Software function=G2
  S3: Software function=M2
  S4: Software function=BM
  S5: Software function=G4
  S6: Software function=M3
  S7: Software function=SM
  S8: Software function=SP
  S9: Software function=M1
  S10: Software function=F3
  S11: Software function=F1
  S12: Software function=F2
  S13: Software function=F4
  S14: Software function=BP
  S15: Software function=F5
  S16: Software function=G1
  S17: Software function=PWR
U1: "Audio CODEC", Order="FN 177-6264", Price=3.01
U2: library part LM386, "Low Voltage Audio Power Amplifier", Order="FN 948-8324", Price=0.63
U3 U3a: "Quad bilateral switch", Order="FN 120-1330", Price=0.173, QT Order=QCI-00331
U4: library part STM32F40x-VG, "STM32F4 controller", Order="FN 233-3297", Price=8.07
U5: "TCXO", Order="FN 206-3959", Price=2.77
U6: library part UA78M33CKVURG3, "VOLT REG, 3.3V, TO-252", Order="FN 245-1041", Price=0.39
U7: library part 24LC01B, "1K I2C Eeprom", Order="FN 133-1323", Price=2.81, QT Order=QCI-00053
U8: library part MC7805BTG, "VOLTAGE REG, 40V, TO220-3", Order="FN 170-3369", Price=0.53
Y1: library part XTAL, "Crystal Oscillator", Checked=NA, Order="FN 971-3808", Price=0.51

## Free pads (board coordinates)
  round 118.11 hole 106.3: 1(2086.61,3090.55) 1(2086.61,5511.81) 1(9232.28,3090.55) 1(9232.28,5511.81)

## Via types
v1: diameter 30, hole 15, Top Layer to Bottom Layer, 687 vias

## Nets (pads, with @x,y where several pads share a name; then routed paths per layer and width w, separated by ;. In a path a pad name is that pad's centre, name@x,y a point inside that pad or via, vN(x,y) a via of type N, cw(c..) or ccw(c..) an arc to the next point about the centre after c; other vN are vias at no path point)
A_3V: C10.2 C11.2 C12.1 C13.1 C24.1 C24a.2 C25.1 Q1.2 R8.1 RFC1.1 U1.8 U1.14 U3.14 U3a.14 | length 2803.3
  Top Layer w10: v1(8090,3995) 8090,4045 8100,4055 8240,4055 8260,4035 v1(8260,4015) 8330,4015 8362,3983 8362,3900 8311,3849 8311,3792 8347,3756 v1(8347,3709)
  Bottom Layer w10: Q1.2@7686.39,4914.66 7766.03,4914.66 ; RFC1.1@7764.14,4390.22 7830,4390.22 ; 7829.14,4714.14 C25.1@7753.78,4714.14 7753.78,4762.78 7766.03,4775.03 7766.03,4914.66 ; 7830,4726 7830,4390.22 ; 7831,4727 U3a.14@7963,4727 ; U3.14@7910,5068 7824.37,5068 C24.1@7824.22,5067.86 7766.03,5009.66 7766.03,4914.66 ; C11.2@7949.78,4259.14 7910.86,4259.14 7860,4310 7860,4375 7844.78,4390.22 7830,4390.22 ; C11.2@7964.78,4259.14 7969.92,4254 8082.08,4254 8104,4232.08 8104,4095.13 U1.8@8104.13,4095 8105,4094.13 8105,4045 8090,4030 v1(8090,3995) ; v1(8260,4015) 8257.68,4017.32 U1.14@8257.68,4095 8308.53,4044.14 C10.2@8344.78,4044.14 8453.51,4044.14 C12.1@8455.22,4045.86 ; v1(8347,3709) 8347,3753.92 R8.1@8358.86,3765.78
A_I_IN: C26.1 P1.5 | length 275
  Bottom Layer w10: P1.5@7650,5525 7672,5525 7767,5430 7813,5430 7824.56,5418.44 C26.1@7824.56,5362.14
A_Q_IN: C31.2 P1.4 | length 278.9
  Bottom Layer w10: P1.4@7750,5525 7750,5474 7777,5447 7824,5447 7873.78,5397.22 C31.2@7946.14,5397.22
AUDIO_OUT_I: C7.1 P1.3 | length 365.1
  Bottom Layer w10: P1.3@7850,5525 7875,5525 7943,5457 8145.63,5457 C7.1@8174.86,5427.78
AUDIO_OUT_Q: C8.1 P1.2 | length 316.4
  Bottom Layer w10: P1.2@7950,5525 7950,5483 7960,5473 8108.22,5473 8109,5473.78 8109,5509 8132.78,5532.78 C8.1@8174.86,5532.78
CRO: C8a.2 U1.13 | length 516.3
  Bottom Layer w10: U1.13@8232.09,4095 8232.09,4154.91 8196,4191 8160,4191 8160,4376 8174,4390 8174,4445 8212.14,4483.14 C8a.2@8267.78,4483.14
ELI: C24b.2 P1.14 R13.2 R14.1 U3.5 U3.12 U3a.5 U3a.6 U3a.12 U3a.13 U4.36 | length 4278.7
  Top Layer w10: v1(5976,5184) 5976,5202 5970,5208 5970,5302.37 6028.63,5361 6201,5361 6300,5460 6526,5460 6543,5477 6672,5477 6720,5525 P1.14@6750,5525 ; v1(7297,5393) 7283,5407 7283,5429 7324,5470 7521,5470 v1(7540,5451) ; v1(7727,5155) 7892,5155 7943,5104 8013,5104 ; v1(8013,4793) 8013,5177 8027,5191 v1(8110,5191)
  Bottom Layer w10: U4.36@5972.33,4791.15 5972.33,4856.33 6006,4890 6006,4992 5970,5028 5970,5148 5976,5154 v1(5976,5184) ; P1.14@6750,5525 6750,5485 6790,5445 6880,5445 6946,5379 7283,5379 v1(7297,5393) ; v1(7540,5451) 7544,5447 7544,5364 ; C24b.2@7595.14,5364.22 7594.92,5364 7544,5364 ; v1(7727,5155) 7697.86,5155 7695.86,5157 7695.86,5194.14 7690,5200 7615,5200 7600,5215 7600,5259.37 7599.14,5260.22 7544.78,5260.22 7544,5261 7544,5364 ; v1(8010,5135) U3.12@8010,5068 8010,5017.57 8021.57,5006 8150,5006 8163,4993 U3a.5@8163,4947 U3a.6@8213,4947 ; v1(8013,4793) U3a.13@8013,4727 U3a.12@8063,4727 ; v1(8110,5191) U3.5@8110,5288
GND: C1.1 C1a.2 C1b.2 C1c.2 C2.1 C3.1 C4.1 C10.1 C11.1 C12.2 C13.2 C14.1 C15.1 C16.2 C17.2 C21.1 C22.2 C23.1 C24.2 C24a.1 C24b.1 C25.2 C27.2 C28.1 C32.2 C32a.2 C32b.2 C33.2 C36.1 C37.2 C38.2 C39.2 C40.1 C50.1 C51.1 C52.1 C53.1 C54.1 C55.1 C56.1 C57.1 C58.1 C59.1 C60.1 C61.1 C62.1 C63.1 C64.1 C65.1 C66.1 C67.2 C68.2 C69.2 C70.2 C71.2 C72.2 C73.2 C74.2 C74a.2 C80.2 C81.2 C82.2 C83.2 C84.1 C85.1 C86.1 C87.1 C88.1 C89.1 C90.1 C91.1 C92.1 C93.1 C94.1 C95.1 C95a.1 C96.2 C97.2 C98.2 C98a.2 C99.2 E1.1 E1.2 E1.C E2.1 E2.2 E2.C E3.1 E3.2 E3.C E4.1 E4.2 E4.C J1.S J2.S J3.S J4.S J10.1 J10.5 J10.6 J11.5 J11.6 J11.7 LCD1.2 LCD1.19 LCD1.22 LCD1.39 LD1.2 LD2.2 P1.1 P1.6 P1.25 P1.30 P4.3 P7.1 pad.1 R1.2 R3.1 R4.1 R11.1 R12.2 R14.2 R15.2 R40.1 S1.1 S2.1 S3.1 S4.1 S5.1 S6.1 S7.1 S8.1 S9.1 S10.1 S11.1 S12.1 S13.1 S14.1 S15.1 S16.1 S17.1 U1.11 U1.15 U1.21 U1.22 U1.28 U2.2 U2.4 U3.7 U3a.7 U4.10 U4.20 U4.27 U4.74 U4.99 U5.2 U6.2 U7.1 U7.2 U7.4 U7.7 U8.2 | length 824.9
  Top Layer w10: J10.5@2301.9,4578.91 J10.5@2331.59,4549.21 ; E3.1@4141.73,4549.21 E3.1@4165,4572.48
  Bottom Layer w10: C80.2@5485.8,4664.72 5485.86,4664.78 5485.86,4629.74 5489.8,4625.8 U4.20@5708.55,4625.8 ; C82.2@5539.78,4184.14 5539.78,4209.78 v1(5570,4240) ; C88.1@5709.14,5155.22 5728.59,5155.22 5795.07,5088.74 ; U4.27@5795.17,4791.15 5795.17,5088.83 ; R40.1@5893.51,3774.14 R40.1@5895.22,3775.86 ; C91.1@6559.14,4275.22 C91.1@6565,4269.37 ; C16.2@7874.78,3549.14 C16.2@7875,3548.92
  other v1: 2240,3040 2400,3040 2560,3040 2720,3040 2880,3040 3040,3040 3200,3040 3360,3040 3520,3040 3680,3040 3840,3040 4000,3040 4160,3040 4320,3040 4480,3040 4640,3040 4800,3040 4960,3040 5120,3040 5280,3040 5440,3040 5600,3040 5760,3040 5920,3040 6080,3040 6240,3040 6400,3040 6560,3040 6720,3040 6880,3040 7040,3040 7200,3040 7360,3040 7520,3040 7680,3040 7840,3040 8000,3040 8160,3040 8320,3040 8480,3040 8640,3040 8800,3040 8960,3040 9120,3040 8946,3144 8946,3174 2160,3200 2320,3200 2480,3200 2640,3200 2800,3200 2960,3200 3120,3200 3280,3200 3440,3200 3600,3200 3760,3200 3920,3200 4080,3200 5040,3200 5200,3200 5360,3200 5520,3200 5680,3200 5840,3200 6000,3200 6160,3200 6320,3200 6480,3200 6640,3200 6800,3200 6960,3200 7440,3200 7600,3200 7760,3200 8080,3200 8240,3200 8880,3200 9113,3200 9200,3200 8772,3210 5400,3264 6146,3267 8436,3270 8436,3300 8808,3318 8436,3330 2080,3360 2720,3360 3840,3360 5440,3360 5920,3360 6400,3360 7680,3360 8160,3360 8320,3360 8436,3360 6147,3362 7441,3405 8556,3408 8556,3438 8808,3456 8436,3462 7872,3468 7902,3468 8556,3468 5310,3480 8910,3480 8940,3480 2748,3488 2517,3489 4078,3489 2997,3490 3265,3490 3595,3490 3927,3490 8436,3492 9115,3497 2160,3520 2320,3520 6960,3520 8080,3520 8720,3520 8436,3522 2368,3534 8436,3552 2631,3571 5065,3572 5865,3572 4837,3573 5595,3573 6069,3573 2864,3574 3751,3574 4076,3574 5299,3574 4529,3581 2420,3602 7914,3618 7443,3651 4958,3653 5185,3653 5418,3654 5955,3654 5757,3655 8142,3660 8220,3660 8346,3660 4565,3677 2080,3680 2400,3680 2880,3680 3040,3680 3680,3680 3840,3680 4160,3680 6880,3680 7710,3708 8052,3714 8088,3714 8124,3714 7131,3715 4673,3728 8574,3738 6406,3751 8574,3768 5688,3786 6217,3804 6320,3807 7709,3811 8346,3822 8406,3822 9288,3822 7394,3831 7129,3837 2480,3840 2800,3840 2960,3840 3280,3840 5200,3840 5520,3840 5840,3840 6480,3840 6640,3840 9040,3840 9200,3840 8574,3852 7925,3880 8574,3882 8406,3948 8090,3955 6078,3960 6144,3960 6321,3962 6403,3964 5928,3972 8214,3972 5820,3990 2080,4000 2240,4000 2560,4000 2720,4000 2880,4000 3040,4000 3200,4000 3360,4000 4320,4000 4480,4000 6080,4000 6880,4000 8640,4000 8800,4000 7356,4017 7638,4020 7734,4020 8175,4025 6420,4110 7354,4111 2800,4160 3120,4160 3280,4160 3600,4160 3920,4160 4080,4160 4240,4160 5200,4160 5360,4160 6800,4160 8400,4160 9040,4160 7632,4182 7734,4182 6409.96,4194 6284,4209 5030,4210 7353,4216 6600,4225 6408,4260 4815,4263 2080,4320 3200,4320 3360,4320 3520,4320 3680,4320 4000,4320 4160,4320 4480,4320 7520,4320 6120,4380 9282,4380 7383,4412 6630,4440 5808,4446 5430,4450 7728,4458 2160,4480 2800,4480 2960,4480 3600,4480 3760,4480 3920,4480 4080,4480 4240,4480 8080,4480 8560,4480 4890,4500 7656,4512 4766,4518 5100,4536 6366,4542 4820,4618 2080,4640 2240,4640 3360,4640 3520,4640 3680,4640 4000,4640 4160,4640 4320,4640 4480,4640 8325,4640 8800,4640 9120,4640 8452,4709 5017,4720 9282,4722 4770,4737 6264,4740 9110,4775 2160,4800 3280,4800 3440,4800 3760,4800 3920,4800 4080,4800 4240,4800 8560,4800 8720,4800 9040,4800 6588,4824 6350,4825 7818,4848 5724,4854 5655,4880 6350,4900 6720,4908 4470.51,4916.45 8448,4932 2080,4960 2240,4960 3360,4960 3840,4960 6143,4960 7040,4960 7520,4960 8640,4960 8800,4960 5646,5016 5730,5016 5100,5034 5064,5070 5100,5070 7655,5070 8448,5070 2511,5099 2428,5100 5028,5106 5064,5106 5100,5106 2640,5120 2800,5120 2960,5120 3120,5120 9040,5120 9276,5124 4992,5142 5028,5142 5064,5142 5100,5142 5136,5142 5875,5175 6582,5178 8676,5202 7095,5205 8335,5217 5735,5240 2080,5280 2240,5280 2400,5280 2560,5280 2880,5280 3040,5280 3200,5280 3520,5280 3680,5280 3840,5280 4000,5280 4160,5280 4480,5280 5440,5280 5600,5280 6880,5280 7360,5280 9120,5280 7734,5346 8355,5403 2429,5409 2320,5440 2640,5440 2800,5440 2960,5440 3120,5440 3280,5440 8560,5440 2531,5447 7882,5452 7648,5453 3883,5463 3465,5464 4246,5464 3668,5465 4064,5466 2475,5509 8400,5532 8580,5532 8760,5532 4065,5551 3466,5552 3883,5552 3667,5553 4246,5553 2641,5554 2961,5554 3121,5554 2799,5555 3280,5556
LCD11: LCD1.11 U4.88 | length 1788.7
  Top Layer w10: v1(6000,4410) 6037.37,4410 6118.09,4490.72 6182.09,4490.72 6215.81,4457 6426.63,4457 6519.63,4550 7351.75,4550 7400.18,4598.43 LCD1.11@7452.76,4598.43
  Bottom Layer w10: v1(6000,4410) 6000,4235 6011.7,4223.3 U4.88@6011.7,4184.85
LCD13: LCD1.13 LCD1.33 U4.52 | length 4399.1
  Top Layer w10: LCD1.33@4539.37,4755.91 4624,4840.54 4624,4999 v1(4637,5012) ; v1(4878,5014) 4927,4965 5190,4965 5203,4978 5203,5057 5273,5127 5549,5127 5718,5296 5736,5296 v1(5805,5365) ; v1(6437,4843) 6513,4843 6529,4859 6637,4859 ; v1@6635,4840 6637,4842 6637,4859 ; v1(7017,4928) 6995,4950 v1(6635,4950) 6637,4948 6637,4859 ; v1(7121,4852) 7121,4877 7152,4908 7152,4944 7264.66,4944 LCD1.13@7452.76,4755.91
  Bottom Layer w10: v1@4639,5014 v1(4878,5014) ; v1(5805,5365) 5805,5345 5846,5304 6342,5304 6360,5322 6384,5322 6402,5304 6402,5283 6508,5177 6508,5037.23 6525.23,5020 6549,5020 6553.78,5015.22 6553.78,4989.22 6563,4980 6606,4980 6635,4951 v1(6635,4950) ; U4.52@6314.85,4704.54 6349.54,4704.54 6359.8,4714.8 6359.8,4765.72 v1@6436.54,4842.46 ; v1@6633.79,4830 v1(6635,4830) ; v1(7017,4928) 7017,4881 7046,4852 v1(7121,4852)
LCD15: LCD1.15 U4.84 | length 2157.2
  Top Layer w10: v1(6090,4320) 6090,4417.37 6113.63,4441 6433.25,4441 6526.25,4534 7358.38,4534 7380.38,4556 7516,4556 7536,4576 7536,4900 7522.61,4913.39 LCD1.15@7452.76,4913.39
  Bottom Layer w10: v1(6090,4320) 6090.44,4319.56 U4.84@6090.44,4184.85
LCD16: LCD1.16 LCD1.35 U4.17 | length 5411.9
  Top Layer w10: LCD1.35@4539.37,4913.39 4578.39,4913.39 4585,4920 4585,5061 v1(4605,5081) ; v1(4877,5093) 4886,5093 4975,5004 5150,5004 5157,5011 5157,5073 5246,5162 5531,5162 5668.5,5299.5 5673.87,5299.5 5702.37,5328 5721.37,5328 5763,5369.63 5763,5388.4 5781.6,5407 ; 5781.6,5408 5888,5408 5896,5416 6168,5416 v1(6168,5455) ; v1(5825,4570) 5986,4570 6100,4684 v1(6100,4850) 6130,4850 6198,4782 6689.63,4782 6772.63,4865 7079.63,4865 7135,4920.37 7135,5075 7155.78,5095.78 7292.14,5095.78 7355.22,5095.78 7414.29,5036.71 7414.29,4999.71 7421.87,4992.13 LCD1.16@7452.76,4992.13 ; v1(6056,5194) 6014,5236 6014,5294 6025.08,5305.08 6060.77,5305.08 6071.19,5315.5 6072.5,5315.5 6090,5333 6257,5333 v1(6258,5334)
  Bottom Layer w10: v1(4605,5081) 4644,5081 4667,5058 4833,5058 4868,5093 v1(4877,5093) ; U4.17@5708.55,4566.74 v1@5825,4566.74 ; v1(6056,5194) 6056,5175 6006,5125 6006,5046 6042,5010 6042,4926 6101,4926 6101,4851 v1(6100,4850) ; v1@6171,5458 v1(6168,5455) 6168,5334 6181,5321 6245,5321 v1(6258,5334)
LCD17: LCD1.17 LCD1.34 U4.18 | length 4888.2
  Top Layer w10: LCD1.34@4539.37,4834.65 4578.65,4834.65 4604,4860 4604,5035 v1(4614,5045) ; v1(4878,5053) 4884,5053 4951,4986 5181,4986 5181,5070 5254,5143 5540,5143 5709,5312 5728,5312 5779,5363 5779,5381.77 5788.23,5391 5923,5391 v1(5940,5374) ; v1(5790,4595) 5797,4602 5904,4602 5912,4594 5986.77,4594 6078,4685.23 6078,4803 6072,4809 v1(6072,4890) 6112.37,4890 6136.37,4866 6136.63,4866 6204.63,4798 6683,4798 6766,4881 7073,4881 7119,4927 7119,5084 7148,5113 7366,5113 7408.13,5070.87 LCD1.17@7452.76,5070.87 ; v1@6017.7,5184 v1(6017.7,5191.3) 5994,5215 5994,5303.75 6021.33,5331.08 v1(6050,5331.08)
  Bottom Layer w10: v1(4614,5045) 4649,5045 4661,5033 4837,5033 4857,5053 v1(4878,5053) ; U4.18@5708.55,4586.43 5781.43,4586.43 v1(5790,4595) ; v1(5940,5374) 5940,5329 5949,5320 6038.92,5320 v1(6050,5331.08) ; v1(6017.7,5191.3) 6017.7,5165.7 5988,5136 5988,5034 6024,4998 6024,4890 6060,4890 v1@6070,4880
LCD40: LCD1.40 U4.83 | length 3536.1
  Top Layer w10: LCD1.40@4539.37,5307.09 4539.91,5307.09 4592,5255 4592,5157 4604,5145 v1(4604,5119) ; v1(5981,3726) 5950.63,3726 5924,3752.63 5924,3869 6050,3995 6050,4071 6105,4126 v1(6110,4126)
  Bottom Layer w10: v1(4604,5119) 4579,5094 4579,5019 4651,4947 4651,4801 4666,4786 4666,4757 4651,4742 4651,4259 4676,4234 4712.37,4234 4740,4206.37 4740,3917 4778,3879 4778,3822 4847,3753 4977,3753 4977,3752.23 5017.23,3712 5038.77,3712 5054,3727.23 5054.23,3727.23 5075,3748 5175,3748 5207,3716 5420,3716 5463,3673 5720,3673 5751,3704 5959,3704 v1(5981,3726) ; v1(6110,4126) 6110.13,4126.13 U4.83@6110.13,4184.85 U4.83@6110,4184.73
LINEIN_L: C2.2 J2.T R9.1 | length 1104.2
  Bottom Layer w10: R9.1@8719.14,5010.22 8790.22,5010.22 8805,5025 8877,5025 8961.06,4940.94 9063.06,4940.94 ; J2.T@9177.17,4940.94 9063.06,4940.94 ; C2.2@9244.78,4470 9204,4470 9177.17,4496.83 9177.17,4748.83 9150,4776 9150,4842 9090,4842 9072,4860 9072,4932 9063.06,4940.94
LINEIN_R: C1.2 J2.R R10.2 | length 763.6
  Bottom Layer w10: R10.2@8710.86,4864.78 8859.78,4864.78 ; J2.R@8862.2,4921.26 8862.2,4865.8 8886,4842 8886,4770 8960,4696 8960,4550 9040,4470 C1.2@9129.78,4470
MIC_IN: C20.2 C21.2 C36.2 J3.T R1.1 R8.2 | length 1711.4
  Bottom Layer w10: C20.2@8365.22,3600.86 8380,3615.63 8380,3640 8434,3694 8454,3694 8454,3918 8460,3924 8586,3924 8616,3954 8730,3954 ; R1.1@8627.22,4063.86 8652.14,4063.86 8685.86,4030.14 C36.2@8733.78,4030.14 ; C36.2@8729.78,4029.14 8729.78,3954.22 8730,3954 ; C21.2@8780.86,3888.78 8780.86,3953.14 8780,3954 ; J3.T@9177.17,3996.06 9177.1,3996 9108,3996 ; J3.T@9177.17,4271.65 9177.17,4155.17 9108,4086 9108,3996 ; 8730,3954 8780,3954 ; 8780,3954 9108,3954 9108,3996
NetC3_2: C3.2 C5.2 J1.T | length 1024.7
  Bottom Layer w10: C5.2@8745.86,5394.78 C5.2@8745.86,5430.86 ; C5.2@8757.86,5417.78 8813.78,5417.78 8846,5450 8935,5450 ; C3.2@8934.14,5500.22 8935,5499.37 8935,5450 ; J1.T@9177.17,5098.43 9091.57,5098.43 9072,5118 9072,5450 ; J1.T@9177.17,5374.02 9177.17,5422.83 9150,5450 9072,5450 ; 8935,5450 9072,5450
NetC4_2: C4.2 C6.2 J1.R | length 473.6
  Bottom Layer w10: C6.2@8757.86,5297.78 8869.78,5297.78 8870,5298 ; J1.R@8870,5352 8870,5298 ; C4.2@8989.14,5040 8989.14,5134.86 8870,5254 8870,5298
NetC5_1: C5.1 C6.1 U1.10 | length 2016.5
  Top Layer w10: v1(8128,4420) v1(8362,4420)
  Bottom Layer w10: v1(8128,4420) 8128,4162 8133,4157 8155.31,4157 U1.10@8155.31,4095 U1.10@8155,4095.32 ; v1(8362,4420) 8362,5034 8287,5109 8287,5329 8323,5365 8533,5365 8585.78,5417.78 C5.1@8622.86,5417.78 C6.1@8622.86,5297.78
NetC7_2: C7.2 U3a.4 | length 885.8
  Bottom Layer w10: U3a.4@8113,4947 8113,4878 8128,4863 8286,4863 8318,4895 8318,5013 8250,5081 8250,5361 8264.86,5375.86 C7.2@8264.86,5427.78 C7.2@8247,5409.92
NetC7a_1: C7a.1 U1.12 | length 668.9
  Bottom Layer w10: C7a.1@7949.4,4508.66 7949.4,4450.6 7952,4448 8151,4448 8156,4443 8156,4406 8144,4394 8144,4174 8182,4174 8206.5,4149.5 U1.12@8206.5,4095
NetC7a_2: C7a.2 U3a.3 | length 542.6
  Top Layer w10: v1(7899,4598) 7899,4704 7924,4729 8052,4729 8062,4739 v1(8062,4882)
  Bottom Layer w10: v1(7899,4598) 7899.66,4598.66 C7a.2@7949.4,4598.66 ; v1(8062,4882) 8062,4946 U3a.3@8063,4947
NetC8_2: C8.2 U3a.10 | length 1410.5
  Bottom Layer w10: U3a.10@8163,4727 8163,4791 8178,4806 8340,4806 8340,5023 ; C8.2@8264.86,5532.78 8301.22,5532.78 8314,5520 8314,5386 ; 8269,5341 8269,5094 8340,5023 ; 8313,5385 8268,5340 8268,5095 8340,5023
NetC8a_1: C8a.1 U3a.11 | length 245.1
  Bottom Layer w10: 8113,4676 U3a.11@8113,4727 ; 8115,4673 8133.26,4654.74 8186.18,4654.74 C8a.1@8267.78,4573.14
NetC9_1: C9.1 U1.9 | length 453.7
  Top Layer w10: v1(8125,4025) 8125,3935 8135,3925 v1(8300,3925)
  Bottom Layer w10: v1@8120,4025 8129.72,4034.72 U1.9@8129.72,4095 ; v1(8300,3925) 8365,3925 8365.86,3924.14 C9.1@8365.86,3879.78
NetC18_1: C18.1 U1.20 | length 1042.6
  Bottom Layer w10: U1.20@8129.72,3807.6 8129.72,3864.72 8200,3935 8245,3935 8310,4000 8533.37,4000 8546,4012.63 8546,4233 8590,4277 8590,4356 8562.14,4383.86 C18.1@8455.22,4383.86
NetC18_2: C18.2 C27.1 U3.2 U3.3 | length 1718.6
  Top Layer w10: v1(7960,5198) 7977,5198 8019,5240 8135,5240 8151,5256 8192,5256 8192,5160 8331.77,5160 8357.77,5134 v1(8361,5134)
  Bottom Layer w10: v1(7960,5198) U3.2@7960,5288 U3.3@8010,5288 ; v1(8361,5134) 8361,5106 8407,5060 8407,4689 8431,4665 8457,4665 ; C18.2@8455.22,4518.86 8455.22,4663.22 8457,4665 ; C27.1@8779.14,4590.22 8695.78,4590.22 8685,4601 8685,4640 8660,4665 8457,4665
NetC19_1: C19.1 U1.19 | length 880.8
  Bottom Layer w10: U1.19@8155.31,3807.6 8155.31,3860.32 8214,3919 8251.63,3919 8316.63,3984 8540,3984 8566,4010 8566,4228 8586,4248 8633.22,4248 C19.1@8633.22,4309.86
NetC19_2: C19.2 C28.2 U3.9 U3.10 | length 1486.5
  Top Layer w10: v1(8159,5134) v1(8321,5134) ; v1(8558,4430) 8677,4430 8697,4450 v1(8700,4450)
  Bottom Layer w10: U3.10@8110,5068 U3.9@8160,5068 8159,5069 v1(8159,5134) ; v1(8321,5134) 8321,5109 8384,5046 8384,4456 8386,4454 8523,4454 8547,4430 v1(8558,4430) ; C19.2@8633.22,4444.86 8638.37,4450 v1(8700,4450) 8730.22,4450 8730.22,4465.22 8739.78,4474.78 C28.2@8780.86,4474.78
NetC20_1: C20.1 U1.18 | length 524.8
  Top Layer w10: v1(8180.91,3715.91) 8180.91,3555.09 8202,3534 v1(8376,3534)
  Bottom Layer w10: v1(8180.91,3715.91) U1.18@8180.91,3807.6 ; C20.1@8375.22,3465.86 8375.22,3533.22 v1(8376,3534)
NetC22_1: C22.1 C23.2 U1.16 | length 337.6
  Bottom Layer w10: C22.1@8144.55,3598.29 8257.65,3598.29 C23.2@8260.22,3600.86 8260.22,3721.78 8232,3750 8232,3807.51 U1.16@8232.09,3807.6 ; C22.1@8144.78,3599.14 C22.1@8146.49,3600.86
NetC26_2: C26.2 U3.1 | length 92
  Bottom Layer w10: C26.2@7824.56,5272.14 7840.41,5288 U3.1@7910,5288
NetC29_1: C29.1 U3.4 | length 589.3
  Top Layer w10: v1(8061,5348) 8061,5268.71 8069,5260.71 8123.71,5260.71 8139,5276 8202,5276 8216,5262 8443,5262 v1(8444,5263)
  Bottom Layer w10: U3.4@8060,5288 8060,5347 v1(8061,5348) ; v1@8444,5264.14 C29.1@8494.78,5264.14
NetC29_2: C29.2 R9.2 R11.2 | length 247.8
  Bottom Layer w10: C29.2@8494.78,5129.14 8625.22,5129.14 R11.2@8629.14,5125.22 ; R11.2@8623.7,5119.78 8623.7,5015.67 R9.2@8629.14,5010.22
NetC30_1: C30.1 U3.11 | length 720.3
  Top Layer w10: v1(8059,5133) 8059,5096 8350.22,4804.78 v1(8495.22,4804.78)
  Bottom Layer w10: v1(8059,5133) 8060,5132 U3.11@8060,5068 ; v1(8495.22,4804.78) C30.1@8495.22,4865.86
NetC30_2: C30.2 R10.1 R12.1 | length 354.7
  Bottom Layer w10: C30.2@8495.22,5000.86 8529.14,5000.86 8580,4950 8600,4950 8620.86,4929.14 R10.1@8620.86,4864.78 ; R12.1@8625.86,4724.78 R10.1@8625.86,4859.78
NetC31_1: C31.1 U3.8 | length 512.6
  Bottom Layer w10: C31.1@8036.14,5397.22 8088.78,5397.22 8124,5362 8227.46,5362 8234,5355.46 8234,5092 U3.8@8210,5068
NetC32_1: C32.1 C33.1 R4a.2 U2.6 | length 1086.7
  Bottom Layer w20: C32.1@7950,3229.89 7950,3121.92 R4a.2@7929.86,3101.78 8603.78,3101.78 8605,3103 8605,3161 ; C33.1@8543.14,3159.22 8603.22,3159.22 8605,3161 ; U2.6@8605,3315 8605,3161
NetC32a_1: C32a.1 R4a.1 R4b.2 | length 252
  Bottom Layer w20: R4b.2@7671.86,3101.78 7674,3103.92 C32a.1@7674,3229.89 ; R4b.2@7677.86,3101.78 R4a.1@7794.86,3101.78 R4a.1@7800.86,3101.78
NetC32b_1: C32b.1 R4d.2 U8.1 | length 730.4
  Bottom Layer w10: C32b.1@2615,4441.11 2615,4480 2637,4502 2752,4502 2773,4523 2969,4523 3004.61,4558.61 U8.1@3004.61,4689.53 3027,4667.14 R4d.2@3133.78,4667.14
NetC34_1: C34.1 R4c.2 | length 150.5
  Bottom Layer w20: R4c.2@8699.63,3099.92 8704.45,3095.11 8779,3095.11 C34.1@8827.89,3144
NetC34_2: C34.2 C38.1 J4.R J4.T | length 1014
  Bottom Layer w20: J4.T@8901.57,3877.95 8901.57,3735.57 8850.39,3684.39 J4.R@8850.39,3523.62 9034.38,3523.62 9064.11,3493.89 9064.11,3399 ; C34.2@9064.11,3144 9064.11,3399 ; C38.1@9125.78,3401.14 9066.25,3401.14 9064.11,3399
NetC35_1: C35.1 R4.2 | length 117.3
  Bottom Layer w10: R4.2@8747.78,3365.14 8857.49,3365.14 C35.1@8862.86,3359.78
NetC35_2: C35.2 R4c.1 U2.5 | length 486.3
  Bottom Layer w20: U2.5@8655,3315 8671,3315 8699.63,3286.37 8699.63,3264 ; R4c.1@8699.63,3189.92 8699.63,3264 ; C35.2@8953.71,3359.56 8953.71,3291.71 8926,3264 8699.63,3264
NetC39_1: C39.1 U2.7 | length 359.8
  Bottom Layer w10: C39.1@8339.14,3301.22 8339.14,3237.86 8349,3228 8537,3228 8555,3246 U2.7@8555,3315
NetC40_2: C40.2 R2.1 R3.2 U2.3 | length 329.9
  Bottom Layer w10: U2.3@8605,3535 8605,3599 8579.14,3624.86 R2.1@8579.14,3654.22 8658.22,3654.22 R3.2@8669.14,3665.14 ; C40.2@8691.14,3758.22 8691.14,3654.22 R3.2@8692.14,3653.22
NetC74a_1: C74a.1 LCD1.1 R35a.2 | length 2405.5
  Top Layer w20: v1(6598,3265) 6598,3143 6632,3109 6834,3109 6859,3134 6859,3210 v1(6810,3259) ; v1(7147,3165) 7173,3139 7473,3139 7483,3149 v1(7483,3173)
  Bottom Layer w20: R35a.2@6523.86,3541.78 6523.86,3469.14 6574.89,3418.11 C74a.1@6574.89,3352 6574.89,3282.11 6592,3265 v1(6598,3265) ; v1(6810,3259) 6846,3259 6875,3230 6875,3114 7061.84,3114 7085,3137.16 7085,3159 7091,3165 v1(7147,3165) ; LCD1.1@7452.76,3811.02 7452.76,3782.24 7504,3731 7504,3547 7483,3526 v1(7483,3173)
NetC80_1: C80.1 C81.1 R41.2 U4.21 | length 823.1
  Bottom Layer w10: R41.2@5484.14,5115.22 5484.14,5079.14 5480,5075 5415,5075 5396,5056 5396,4974 5410,4960 5505,4960 5510,4955 5510,4800 5529.78,4780.22 5574.14,4780.22 C80.1@5574.14,4666.37 ; C80.1@5573.29,4667.22 C80.1@5574.14,4666.37 ; U4.21@5708.55,4645.48 5625,4645.48 5606.48,4664 5576.51,4664 C80.1@5574.14,4666.37
NetC83_1: C83.1 C84.2 R41.1 RFC2.2 U4.22 | length 656.5
  Bottom Layer w10: RFC2.2@5575.86,5219.78 5574.14,5218.07 R41.1@5574.14,5115.22 5574.14,5010.22 C83.1@5574.14,4900.22 5622,4852.37 5622,4674 5630.83,4665.17 U4.22@5708.55,4665.17
NetC91_2: C91.2 U4.73 | length 165.9
  Bottom Layer w10: U4.73@6316,4290 U4.73@6314.85,4291.15 6351.15,4291.15 6368,4308 6393,4308 6408,4293 6451.37,4293 C91.2@6461.68,4282.68
NetC92_2: C92.2 U4.49 | length 179.7
  Bottom Layer w10: U4.49@6228.24,4791.15 6228.24,4873.24 6265,4910 6290.63,4910 C92.2@6304.78,4924.14
NetC93_2: C93.2 R42.1 Y1.1 | length 369.3
  Bottom Layer w10: C93.2@4725.22,4665.86 4878.85,4665.86 Y1.1@4890,4677.01 4972.23,4594.78 R42.1@5055.86,4594.78
NetC94_2: C94.2 R43.1 Y1.2 | length 475.8
  Bottom Layer w10: C94.2@4724.78,4319.14 4873.85,4319.14 Y1.2@4890,4302.99 4955,4367.99 4955,4475 4964.78,4484.78 R43.1@5055.86,4484.78